# Altium PCB PCB.PcbDoc
Units mil, origin at the board's own origin, x right, y up, seen from the top; angles counter-clockwise.
Board outline 3543.31 x 1968.5 mil, 2 copper layers (Top Layer, Bottom Layer); 24 components, 21 nets, 115 pads, 15 vias.
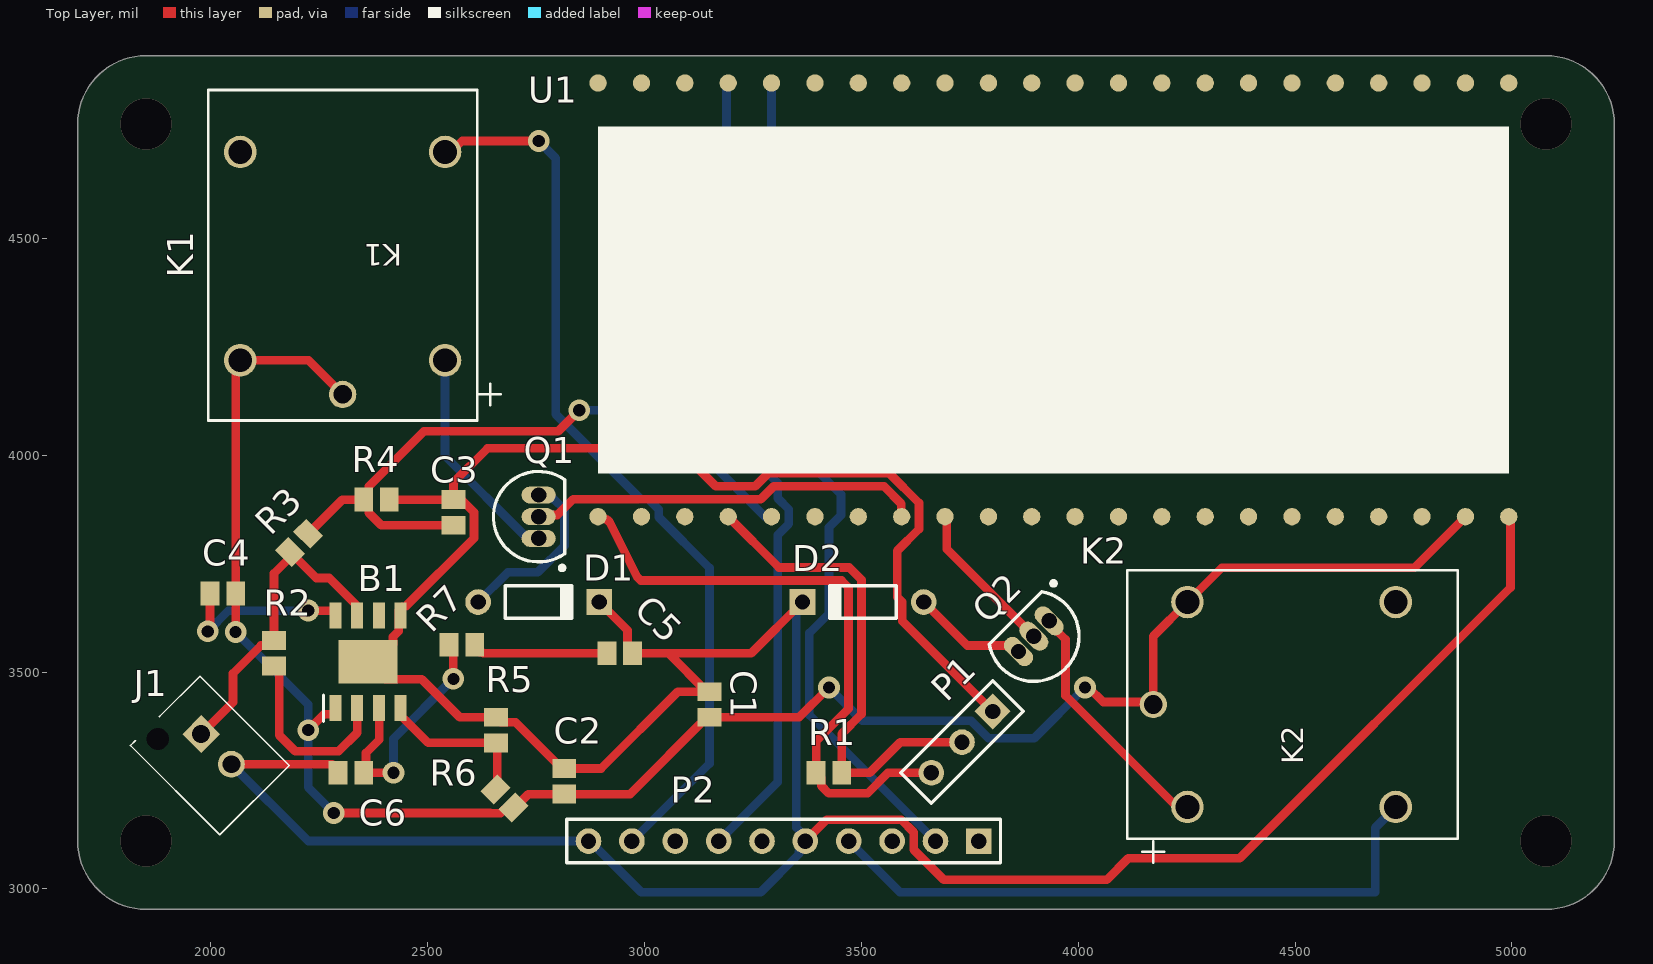
[diagram p0: Top Layer view]
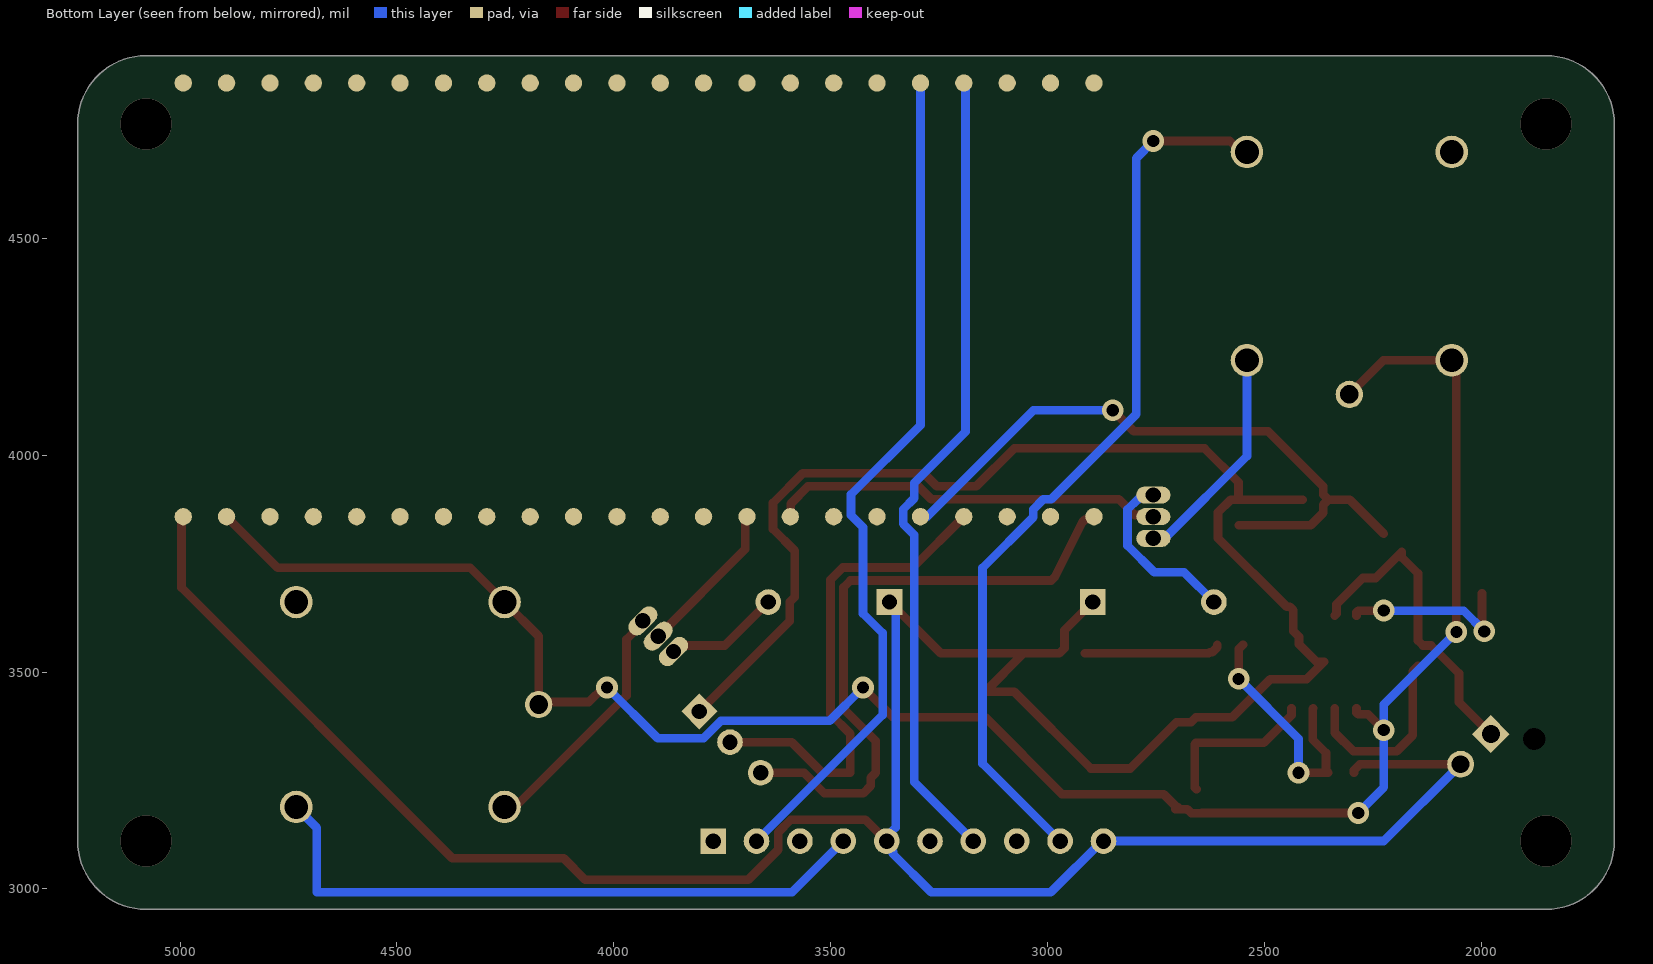
[diagram p1: Bottom Layer view, seen from below]

## Layer stack, top to bottom
Top Solder: solder mask 0.4, Solder Resist, Dk 3.5
Top Layer: signal copper 1.4
Dielectric 1: dielectric 12.6, FR-4, Dk 4.8
Bottom Layer: signal copper 1.4
Bottom Solder: solder mask 0.4, Solder Resist, Dk 3.5

## Board outline
1692.91,3110.24 1692.91,4763.78 cw(c1850.39,4763.78) 1850.39,4921.26 5078.74,4921.26 cw(c5078.74,4763.78) 5236.22,4763.78 5236.22,3110.24 cw(c5078.74,3110.24) 5078.74,2952.76 1850.39,2952.76 cw(c1850.39,3110.24)

## Design rules (kind name [scope] priority, off if disabled: settings)
Clearance [All] p1: gap=10 ignorepadtopadclearanceinfootprint=FALSE
PolygonConnect [All] p1: connectstyle=Relief reliefconductorwidth=10 reliefentries=4 polygonreliefangle="90 Angle" airgapwidth=10
RoutingVias [All] p1: holewidth=28 width=50 viastyle="Through Hole" minholewidth=28 minwidth=50 maxholewidth=28 maxwidth=50
SolderMaskExpansion [All] p1: expansion=4 istentingtop=FALSE
SupplyNets "Schematic Supply Nets_9" [InNet('ADC1')] p1: voltage=0.000
SupplyNets "Schematic Supply Nets_8" [InNet('VCC')] p2: voltage=0.000
SupplyNets "Schematic Supply Nets_7" [InNet('PWM1')] p3: voltage=0.000
SupplyNets "Schematic Supply Nets_6" [InNet('PWM2')] p4: voltage=0.000
SupplyNets "Schematic Supply Nets_5" [InNet('GPIO16')] p5: voltage=0.000
SupplyNets "Schematic Supply Nets_4" [InNet('GPIO15')] p6: voltage=0.000
SupplyNets "Schematic Supply Nets_3" [InNet('PW2')] p7: voltage=0.000
SupplyNets "Schematic Supply Nets_2" [InNet('PW1')] p8: voltage=0.000
SupplyNets "Schematic Supply Nets_1" [InNet('5V')] p9: voltage=0.000
SupplyNets "Schematic Supply Nets" [InNet('GND')] p10: voltage=0.000
Width [All] p1: maxlimit=20 minlimit=10 preferedwidth=10
30 further rules are at their usual default settings.

## Components (designator, comment, footprint, x,y, rotation, side; value= is the part's Value field where it differs from the comment)
B1 "MP1584EN-LF-P" SOIC127P600X170-9N 2362.2,3523.62 r90 top
C1 "Cap" C0805 3149.61,3425.2 r90 top value=1000uF
C2 "Cap" C0805 2814.96,3248.03 r90 top value=10uF
C3 "Cap" C0805 2559.05,3868.11 r270 top value=100nF
C4 "Cap" C0805 2027.56,3681.1 r180 top value=100nF
C5 "Cap" C0805 2942.91,3543.31 r180 top value=100nF
C6 "Cap" C0805 2322.83,3267.72 r0 top value=100nF
D1 "Diode 1N4148" DO-35 2755.91,3661.42 r0 top
D2 "Diode 1N4148" DO-35 3503.94,3661.42 r180 top
J1 "B2B-XH-AM_LF__SN_" B2BXHAMLFSN 1977.65,3357 r135 top
K1 "SRD-05VDC-SL-C" RELAY_SRD-05VDC-SL-C_MCE 2303.83,4140.25 r180 top
K2 "SRD-05VDC-SL-C" RELAY_SRD-05VDC-SL-C_MCE 4173.23,3425.2 r90 top
P1 "Header 3" HDR1X3 3802.84,3409.14 r225 top
P2 "Header 10" HDR1X10 3770.87,3110.24 r180 top
Q1 "NPN" TO-226-AA 2755.91,3858.27 r0 top
Q2 "NPN" TO-226-AA 3897.64,3582.68 r135 top
R1 "Res2" C0805 3425.2,3267.72 r0 top value=10K
R2 "Res2" C0805 2145.67,3543.31 r270 top value=100K
R3 "Res2" C0805 2203.53,3798.02 r45 top value=100K
R4 "Res2" C0805 2381.89,3897.64 r0 top value=47K
R5 "Res2" C0805 2657.48,3366.14 r90 top value=2.2K
R6 "Res2" C0805 2677.17,3208.66 r315 top value=10K
R7 "Res2" C0805 2578.74,3562.99 r180 top value=22K
U1 "ESP32-S3" ESP32-S3 2892.91,3858.27 r90 top

## Footprints (in the part's own frame and the unit in brackets; to place one, negate y for a bottom-side part, rotate by r counter-clockwise, add the part's x,y. Pads: shape width x height; smd on the part's side, far side on the other; paste and mask are expansions set on the pad)
B2BXHAMLFSN [mm]
  rect 1.575x1.575 hole 1.05: 1(0,0)
  round 1.575 hole 1.05: 2(-2.5,0)
  round 0.65 hole 1.3 unplated: MH1(1.6,2)
  silkscreen extent -4.95,-2.35 2.45,3.4
C0805 [mm] "Chip Capacitor, Body 2.0x1.3mm, IPC High Density"
  rect 1.1x1.4 smd: 1(-0.75,0) 2(0.75,0)
  body extent -1.1,-0.72 1.1,0.72, height 1.4
DO-35 [mm] "Diode, Axial; Body 3.8 x 1.9 mm (LxDia. max), Lead Dia. 0.53 mm (max)"
  round 1.5 hole 0.9: 1(-3.55,0)
  rect 1.5x1.5 hole 0.9: 2(3.55,0)
  silkscreen extent -1.95,-0.95 2.05,0.95
ESP32-S3 [mil]
  round 40 all layers, no hole paste-99999: 1(0,0) 2(0,-100) 3(0,-200) 4(0,-300) 5(0,-400) 6(0,-500) 7(0,-600) 8(0,-700) 9(0,-800) 10(0,-900) 11(0,-1000) 12(0,-1100) 13(0,-1200) 14(0,-1300) 15(0,-1400) 16(0,-1500) 17(0,-1600) 18(0,-1700) 19(0,-1800) 20(0,-1900) 21(0,-2000) 22(0,-2100) 23(1000,-2100) 24(1000,-2000) 25(1000,-1900) 26(1000,-1800) 27(1000,-1700) 28(1000,-1600) 29(1000,-1500) 30(1000,-1400) 31(1000,-1300) 32(1000,-1200) 33(1000,-1100) 34(1000,-1000) 35(1000,-900) 36(1000,-800) 37(1000,-700) 38(1000,-600) 39(1000,-500) 40(1000,-400) 41(1000,-300) 42(1000,-200) 43(1000,-100) 44(1000,0)
  silkscreen extent 100,-2100 900,0
HDR1X3 [mm] "Connector; Header; 3 Position"
  rect 1.5x1.5 hole 0.9: 1(0,0)
  round 1.5 hole 0.9: 2(2.54,0) 3(5.08,0)
  silkscreen extent -1.27,-1.27 6.35,1.27
HDR1X10 [mm] "Connector; Header; 10 Position"
  rect 1.5x1.5 hole 0.9: 1(0,0)
  round 1.5 hole 0.9: 2(2.54,0) 3(5.08,0) 4(7.62,0) 5(10.16,0) 6(12.7,0) 7(15.24,0) 8(17.78,0) 9(20.32,0) 10(22.86,0)
  silkscreen extent -1.27,-1.27 24.13,1.27
RELAY_SRD-05VDC-SL-C_MCE [mil]
  round 63 hole 43 paste-99999 mask+0: 1(0,0)
  round 75 hole 55 paste-99999 mask+0: 2(-236.22,-78.74) 3(-236.22,-559.09) 4(236.22,-559.09) 5(236.22,-78.74)
  silkscreen extent -365,-702 310,60
SOIC127P600X170-9N [mm]
  rect 1.525x0.7 smd: 1(-2.712,1.905) 2(-2.712,0.635) 3(-2.712,-0.635) 4(-2.712,-1.905) 5(2.712,-1.905) 6(2.712,-0.635) 7(2.712,0.635) 8(2.712,1.905)
  rect 2.56x3.45 smd: 9(0,0)
  silkscreen extent -3.47,2.61 -1.95,2.61
TO-226-AA [mm] "TO, Flat Index; 3 In-Line, Axial Leads; Body Dia. 4.8mm; Leads 0.55 x 0.51 mm (max)"
  oval 2x1 hole 0.9: 1(0,-1.27) 2(0,0) 3(0,1.27)
  silkscreen extent -2.65,-3.13 1.52,2.65, body extent -2.65,-2.66 1.52,2.66, height 5.33

## Part data
B1: "Switching Voltage Regulators NRFND: USE MP2338 as replacement", Manufacturer_Name="Monolithic Power Systems (MPS)", Mouser Part Number=946-MP1584EN-LF-P, Datasheet Link=https://componentsearchengine.com/Datasheets/1/MP1584EN-LF-P.pdf, Geometry.Height=1.7mm, Manufacturer_Part_Number=MP1584EN-LF-P, Mouser Price/Stock=https://www.mouser.co.uk/ProductDetail/Monolithic-Power-Systems-MPS/MP1584EN-LF-P?qs=%252B6g0mu59x7Ie1GinT4nULQ%3D%3D
C1 C2 C3 C4 C5 C6: "Capacitor", LatestRevisionDate=17-Jul-2002, LatestRevisionNote="Re-released for DXP Platform.", PackageDescription="Radial Cap, Thru-Hole; 2 Leads; 0.3 in Pin Spacing", PackageReference=RAD-0.3, Published=8-Jun-2000, Publisher="Altium Limited"
D1 D2: "High Conductance Fast Diode", Code_JEDEC=DO-204-AH, ComponentLink1Description="Manufacturer Link", ComponentLink1URL=http://www.fairchildsemi.com/, ComponentLink2Description=Datasheet, ComponentLink2URL=http://www.fairchildsemi.com/ds/1N%2F1N4148.pdf, DatasheetVersion=1997, LatestRevisionDate=17-Jul-2002, LatestRevisionNote="Re-released for DXP Platform.", PackageDescription="Diode, Axial; Body 3.8 x 1.9 mm (LxDia. max), Lead Dia. 0.53 mm (max)", PackageReference=DO-35, Published=8-Jun-2000, Publisher="Altium Limited"
J1: "CONN HEADER VERT 2POS 2.5MM", Arrow Part Number=B2B-XH-AM(LF)(SN), Manufacturer_Name="JST (JAPAN SOLDERLESS TERMINALS)", Mouser Part Number=306-B2B-XH-AMLFSNP, Arrow Price/Stock=https://www.arrow.com/en/products/b2b-xh-am-lf-sn/jst-manufacturing?utm_currency=USD&region=europe, Datasheet Link=https://www.jst-mfg.com/product/pdf/eng/eXH.pdf, Geometry.Height=7mm, Manufacturer_Part_Number=B2B-XH-AM(LF)(SN), Mouser Price/Stock=https://www.mouser.co.uk/ProductDetail/JST-Commercial/B2B-XH-AMLFSN?qs=cdbOS8ANM9BJgHgwB7WxQw%3D%3D
K1 K2: "Description", Manufacturer_Name="MCM Electronics", Copyright="Copyright (C) 2026 Ultra Librarian. All rights reserved.", Manufacturer_Part_Number=SRD-05VDC-SL-C, RefDes=RefDes, Type=Type
P1: "Header, 3-Pin", LatestRevisionDate=17-Jul-2002, LatestRevisionNote="Re-released for DXP Platform.", Publisher="Altium Limited"
P2: "Header, 10-Pin", LatestRevisionDate=17-Jul-2002, LatestRevisionNote="Re-released for DXP Platform.", Publisher="Altium Limited"
Q1 Q2: "NPN Bipolar Transistor", Code_JEDEC=TO-226-AA, LatestRevisionDate=17-Jul-2002, LatestRevisionNote="Re-released for DXP Platform.", PackageDescription="TO, Flat Index; 3 In-Line, Axial Leads; Body Dia. 4.8mm; Leads 0.55 x 0.51 mm (max)", PackageReference=TO-226-AA, Published=8-Jun-2000, Publisher="Altium Limited"
R1 R2 R3 R4 R5 R6 R7: "Resistor", LatestRevisionDate=17-Jul-2002, LatestRevisionNote="Re-released for DXP Platform.", PackageDescription="Axial Device, Thru-Hole; 2 Leads; 0.4 in Pin Spacing", PackageReference=AXIAL-0.4, Published=8-Jun-2000, Publisher="Altium Limited"

## Via types
v1: diameter 50, hole 28, Top Layer to Bottom Layer, 11 vias
v2: diameter 118.11, hole 118.11, Top Layer to Bottom Layer, 4 vias

## Nets (pads, with @x,y where several pads share a name; then routed paths per layer and width w, separated by ;. In a path a pad name is that pad's centre, name@x,y a point inside that pad or via, vN(x,y) a via of type N, cw(c..) or ccw(c..) an arc to the next point about the centre after c; other vN are vias at no path point)
5V: B1.1 C1.1 C2.1 C4.1 K1.1 K1.5 K2.1 K2.5 R6.2 U1.21 | length 4621.5
  Top Layer w20: v1(2057.09,3592.52) C4.1 2057.09,4208.47 K1.5 2225.09,4218.99 K1.1 ; v1(2224.41,3366.14) 2260.98,3402.71 2283.43,3402.71 2287.2,3406.49 B1.1 ; v1(2283.46,3174.92) 2643.65,3174.92 2643.83,3174.74 2668.52,3174.74 2677.39,3183.61 2705.61,3183.61 2705.61,3191.96 2732.16,3218.5 C2.1 2966.54,3218.5 3143.7,3395.67 3356.3,3395.67 v1(3425.2,3464.57) ; R6.2 R6.2@2701.43,3187.78 ; v1(4015.75,3464.57) 4023.87,3464.57 4057.68,3430.75 K2.1@4173.23,3430.75 ; K2.1 4173.23,3582.68 K2.5 4330.71,3740.16 4774.8,3740.16 U1.21
  Bottom Layer w20: v1(2057.09,3592.52) 2224.41,3425.2 v1(2224.41,3366.14) 2224.41,3233.98 v1(2283.46,3174.92) ; v1(3425.2,3464.57) 3501.81,3387.95 3752.64,3387.95 3793.22,3347.38 3898.56,3347.38 v1(4015.75,3464.57)
ADC1: C3.2 R3.2 R4.1 U1.5 | length 1525.6
  Top Layer w20: R3.2 2303.15,3897.64 R4.1 ; C3.2 2392.98,3838.58 2364.02,3867.54 2364.02,3885.98 R4.1 ; v1(2849.6,4103.81) 2800.91,4055.12 2491.4,4055.12 2364.02,3927.73 2364.02,3909.29 R4.1
  Bottom Layer w20: v1(2849.6,4103.81) 3032.01,4103.81 U1.5@3277.55,3858.27
GND: B1.5 B1.9 C1.2 C2.2 C3.1 C5.1 C6.1 D1.2 D2.2 J1.2 P1.1 P2.5 P2.10 R4.2 R5.2 U1.22 | length 8650.1
  Top Layer w20: J1.2 2279.53,3287.4 2293.31,3273.62 C6.1 ; R4.2 C3.1 ; C2.2@2809.05,3277.56 2702.6,3384.02 2669.13,3384.02 R5.2 2573.8,3395.67 2486.24,3483.23 2402.6,3483.23 B1.9 2379.72,3523.62 2420.12,3564.02 2420.12,3581.54 2433.43,3594.84 2433.43,3642.85 2440.98,3650.41 2448.38,3650.41 2606.61,3808.64 2606.61,3868.52 2577.5,3897.64 C3.1 ; C2.2 2899.53,3277.56 3076.69,3454.72 C1.2@3143.7,3454.72 ; D1.2 2960.79,3596.3 2960.79,3554.96 C5.1 3055.12,3543.31 ; C1.2 C1.2@3143.7,3454.72 ; D2.2 3246.06,3543.31 3055.12,3543.31 ; P2.5 3420.39,3159.76 3591.38,3159.76 3620.87,3130.28 3620.87,3090.19 3689.72,3021.34 4066.22,3021.34 4115.75,3070.87 4372.66,3070.87 4996.73,3694.94 4996.73,3854.44 U1.22 ; P1.1 3594.17,3617.8 3594.17,3661.58 3582.68,3673.07 3582.68,3779.53 3632.91,3829.76 3632.91,3889.84 3564.47,3958.27 3285.29,3958.27 3255.29,3928.27 3164.12,3928.27 3076.64,4015.75 2637.8,4015.75 2559.62,3937.58 2559.62,3898.21 C3.1 ; 3055.12,3543.31 C1.2@3143.7,3454.72
  Bottom Layer w20: J1.2 2224.41,3110.24 P2.10 ; P2.10@2872.44,3111.81 2992.13,2992.13 3267.72,2992.13 3356.25,3080.66 3356.25,3085.06 P2.5@3376.15,3104.95 ; D2.2 3350.2,3647.44 3350.2,3141.47 3370.87,3120.8 P2.5
GPIO15: Q1.2 U1.8 | length 912.1
  Top Layer w20: Q1.2 2759.61,3861.97 2798.98,3861.97 2835.28,3898.27 3267.72,3898.27 3297.72,3928.27 3552.05,3928.27 3592.12,3888.19 3592.12,3859.05 U1.8
GPIO16: Q2.2 U1.9 | length 357.1
  Top Layer w20: U1.9@3696.73,3856.58 3696.73,3783.58 Q2.2
NetB1_2: B1.2 R2.2 | length 433.9
  Top Layer w20: R2.2 2146.1,3513.78 2157.75,3502.13 2157.75,3354.06 2194.41,3317.4 2294.28,3317.4 2337.2,3360.33 B1.2
NetB1_3: B1.3 C6.2 R7.2 | length 590
  Top Layer w20: B1.3 2388.57,3415.49 2388.57,3344.63 2357.5,3313.56 2357.5,3272.85 C6.2 2359.83,3267.72 v1(2421.26,3267.72) ; R7.2 2559.06,3553.15 v1(2559.06,3484.25)
  Bottom Layer w20: v1(2421.26,3267.72) 2421.26,3346.46 v1(2559.06,3484.25)
NetB1_4: B1.4 R5.1 R6.1 | length 373.1
  Top Layer w20: B1.4 2437.2,3400.61 2501.2,3336.61 R5.1 2660.46,3333.63 2660.46,3233.72 R6.1
NetB1_8: B1.8 C4.2 | length 406.2
  Top Layer w20: v1@1988.19,3602.36 1998.03,3612.2 C4.2 ; v1(2224.41,3641.73) 2283.43,3641.73 2287.2,3637.95 B1.8
  Bottom Layer w20: v1(1992.78,3593.78) 2040.74,3641.73 v1(2224.41,3641.73)
NetC5_2: C5.2 R7.1 | length 316.7
  Top Layer w20: R7.1 2608.27,3557.09 2619.92,3545.43 2625.83,3545.43 2627.95,3543.31 C5.2
NetD1_1: D1.1 Q1.3 | length 409.3
  Bottom Layer w20: D1.1 2685.08,3730.36 2753.81,3730.36 2815.28,3791.83 2815.28,3874.71 2792.03,3897.95 2791.15,3897.95 2780.83,3908.27 Q1.3
NetD2_1: D2.1 Q2.3 | length 265.8
  Top Layer w20: D2.1 3743.88,3561.24 3848.36,3561.24 Q2.3
NetK1_2: K1.2 Q1.1 | length 515.3
  Bottom Layer w20: K1.2 2540.05,3998.32 2726.39,3811.97 2752.2,3811.97 Q1.1
NetK2_2: K2.2 Q2.1 | length 551.1
  Top Layer w20: Q2.1 3932.99,3612.79 3970.75,3575.04 3970.75,3445.93 K2.2@4227.7,3188.98
NetP1_2: P1.2 R1.2 U1.4 | length 1138.3
  Top Layer w20: U1.4 3310.23,3740.94 3472.38,3740.94 3500.2,3713.13 3500.2,3403.25 3454.72,3357.78 R1.2 3519.17,3267.72 3589.88,3338.43 P1.2
NetP1_3: P1.3 R1.1 U1.1 | length 1443.1
  Top Layer w20: U1.1 2914.1,3851.2 2919.74,3845.57 2982.97,3719.1 2985.26,3716.8 2991.12,3710.94 3454.41,3710.94 3470.2,3695.16 3470.2,3415.68 3395.67,3341.15 R1.1 3407.32,3256.06 3407.32,3237.62 3424.79,3220.16 3514.04,3220.16 3561.6,3267.72 P1.3
PW1: K1.3 P2.9 | length 2088.1
  Top Layer w20: K1.3 2554.19,4699.34 2579.26,4724.41 v1(2755.91,4724.41)
  Bottom Layer w20: v1(2755.91,4724.41) 2795.28,4685.04 2795.28,4094.49 2991.5,3898.27 3009.47,3898.27 3032.91,3874.84 3032.91,3856.86 3149.61,3740.16 3149.61,3288.98 P2.9
PW2: K2.3 P2.4 | length 1479.5
  Bottom Layer w20: P2.4 3588.98,2992.13 4685.04,2992.13 4685.04,3140.79 4732.31,3188.07 K2.3
PWM1: P2.7 U1.41 | length 1859
  Bottom Layer w20: P2.7 3307.09,3246.46 3307.09,3815.88 3332.91,3841.7 3332.91,3874.84 3307.09,3900.66 3307.09,3936.19 3188.98,4054.3 U1.41@3188.98,4842.52
PWM2: P2.2 U1.40 | length 1964.8
  Bottom Layer w20: U1.40 3292.91,4069.3 3452.91,3909.3 3452.91,3861.7 3425.2,3833.99 3425.2,3635.1 3380.2,3590.1 3380.2,3400.91 P2.2
VCC: B1.7 J1.1 R2.1 R3.1 | length 744.1
  Top Layer w20: J1.1 2051.16,3430.51 2051.16,3496.77 2115.57,3561.18 2134.02,3561.18 R2.1 2145.67,3727.26 2182.65,3764.24 R3.1 2243.08,3716.71 2272.97,3716.71 2333.43,3656.26 2333.43,3634.17 B1.7
pads on no net: B1.6 J1.MH1 K1.4 K2.4 P2.1 P2.3 P2.6 P2.8 U1.2 U1.3 U1.6 U1.7 U1.10 U1.11 U1.12 U1.13 U1.14 U1.15 U1.16 U1.17 U1.18 U1.19 U1.20 U1.23 U1.24 U1.25 U1.26 U1.27 U1.28 U1.29 U1.30 U1.31 U1.32 U1.33 U1.34 U1.35 U1.36 U1.37 U1.38 U1.39 U1.42 U1.43 U1.44
copper on no net:
  other v2: 1850.39,3110.24 5078.74,3110.24 1850.39,4763.78 5078.74,4763.78

## Silkscreen, mask and mechanical layers (free items; w line width, h text height)
Mechanical 1:
  the board outline again, w10